# Altium PCB RS-220-973.PcbDoc
Units mil, origin at the board's own origin, x right, y up, seen from the top; angles counter-clockwise.
Board outline 4797 x 2670 mil, 2 copper layers (Top Layer, Bottom Layer); 133 components, 139 nets, 344 pads, 0 vias.
Unrouted connection lines stored in the file: 202.
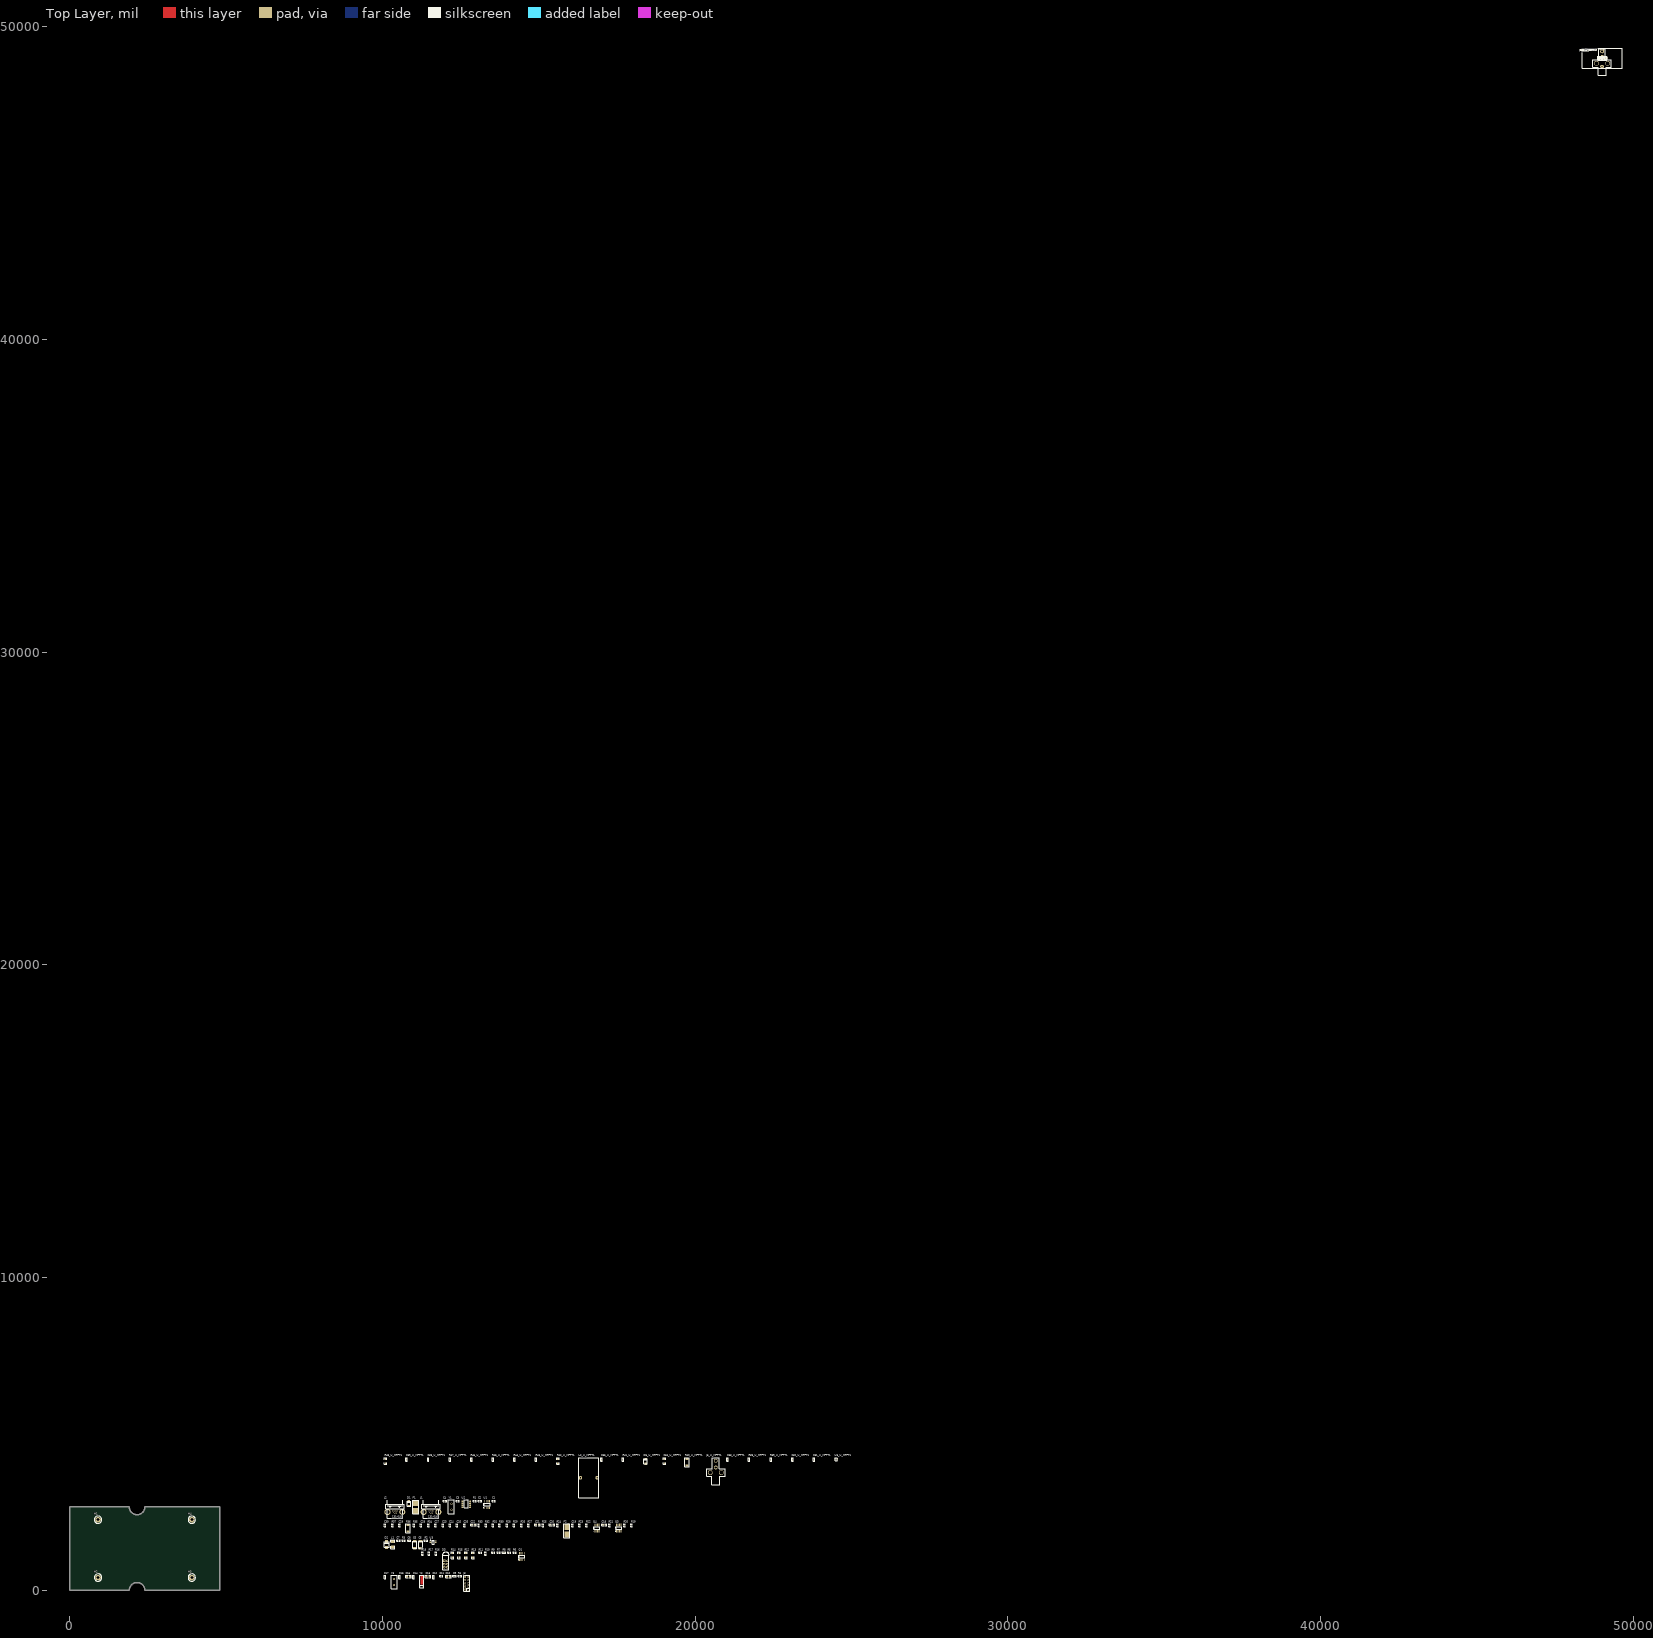
[diagram p0: Top Layer view]
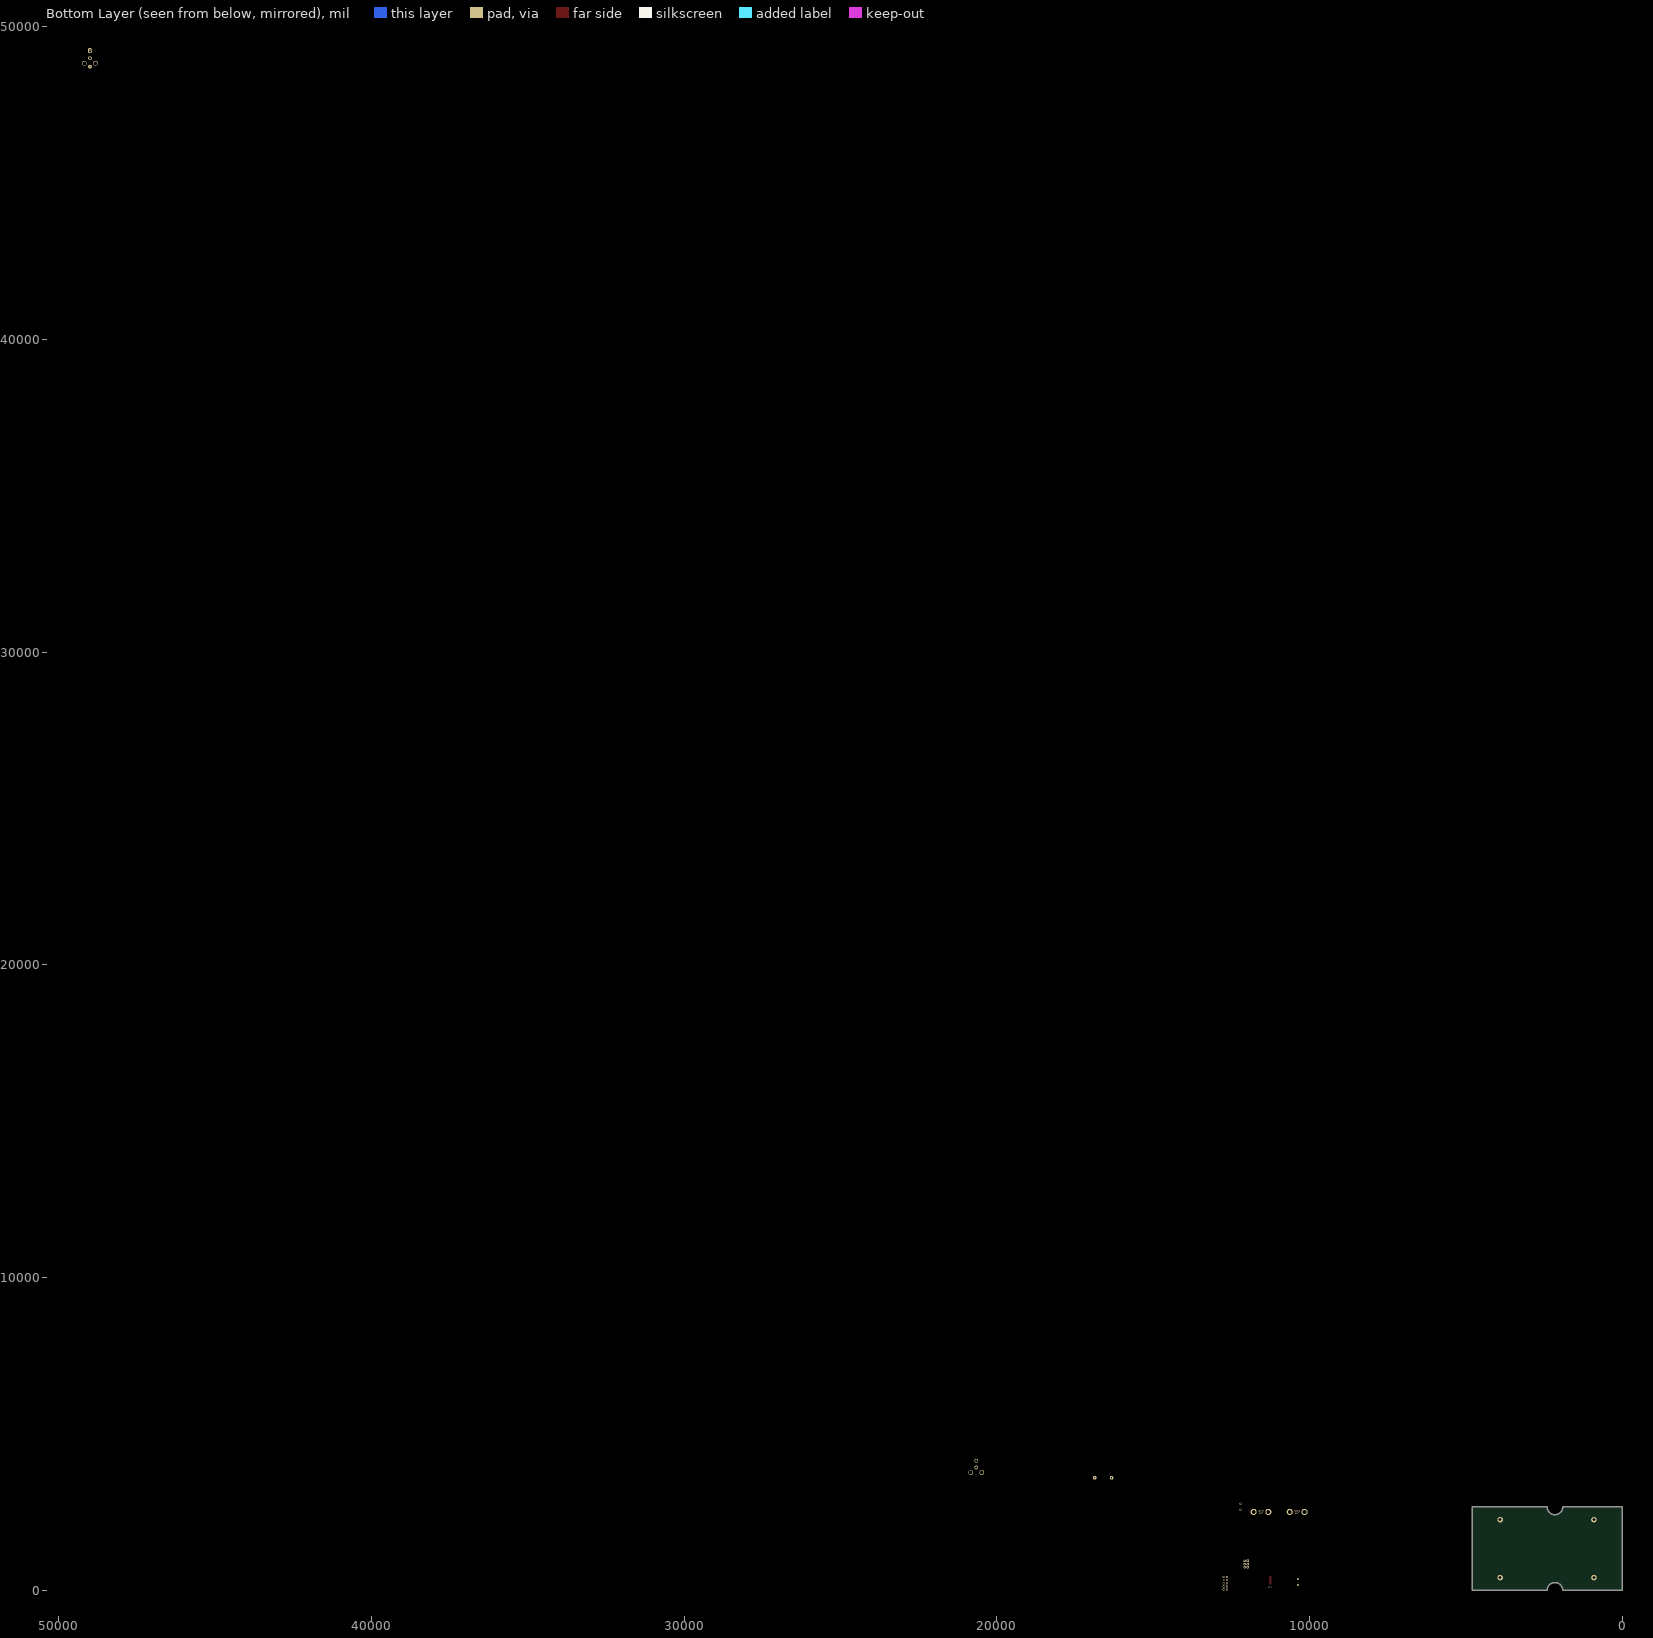
[diagram p1: Bottom Layer view, seen from below]

## Layer stack, top to bottom
Top Layer: signal copper 1.4
Dielectric: dielectric 12.6, FR-4, Dk 4.8
Bottom Layer: signal copper 1.4

## Board outline
0,0 0,2670 1898,2670 ccw(c2148,2670) 2398,2670 4797,2670 4797,0 2398,0 ccw(c2148,0) 1898,0

## Design rules (kind name [scope] priority, off if disabled: settings)
Clearance [All] p1: gap=10
ComponentClearance [All] p1: gap=10 collisioncheckmode=3 verticalgap=10
PolygonConnect [All] p1: connectstyle=Relief reliefconductorwidth=10 reliefentries=4 polygonreliefangle="90 Angle"
RoomDefinition U_3V-Switcher-50mA [InComponentClass('U_3V-Switcher-50mA')] p1: confinementstyle=ConfineIn formatcopy=TRUE lockcomponents=FALSE outline 10045,1290 11740,1290 11740,1725 10045,1725
RoomDefinition "Unisolated CAN" [InComponentClass('Unisolated CAN')] p2: confinementstyle=ConfineIn formatcopy=TRUE lockcomponents=FALSE outline 10045,2295 13615,2295 13615,3000 10045,3000
RoomDefinition U_MPPT2 [InComponentClass('U_MPPT2')] p3: confinementstyle=ConfineIn formatcopy=TRUE lockcomponents=FALSE outline -1000,-1000 1000,-1000 1000,0 -1000,0
RoomDefinition U_MPPT1 [InComponentClass('U_MPPT1')] p4: confinementstyle=ConfineIn formatcopy=TRUE lockcomponents=FALSE outline -1000,-1000 1000,-1000 1000,0 -1000,0
RoomDefinition U_Battery [InComponentClass('U_Battery')] p5: confinementstyle=ConfineIn formatcopy=TRUE lockcomponents=FALSE outline -1000,-1000 1000,-1000 1000,0 -1000,0
RoomDefinition TopLevel [InComponentClass('TopLevel')] p6: confinementstyle=ConfineIn formatcopy=TRUE lockcomponents=FALSE outline -1000,-1000 1000,-1000 1000,0 -1000,0
RoomDefinition MSP430 [InComponentClass('MSP430')] p7: confinementstyle=ConfineIn formatcopy=TRUE lockcomponents=FALSE outline -1000,-1000 1000,-1000 1000,0 -1000,0
RoutingVias [All] p1: holewidth=28 width=50 viastyle="Through Hole" minholewidth=28 minwidth=50 maxholewidth=28 maxwidth=50
SolderMaskExpansion [All] p1: expansion=4
TestPointUsage [All] p1: valid=0 allowmultiple=FALSE
Testpoint [All] p1: side=15 testpointundercomponent=TRUE minsize=40 maxsize=100 preferedsize=60 minholesize=0 maxholesize=40 preferedholesize=32 testpointgrid=1 style=1023 order=0123456789
Width [All] p1: maxlimit=10 minlimit=10 preferedwidth=10
17 further rules are at their usual default settings.

## Classes and differential pairs
channel class MPPT: U_MPPT1 U_MPPT2
component class "Unisolated CAN": C1 C2 C3 C4 D1 F1 J1 J2 R1 U1 U2 Y1
component class U_MPPT2: C31_U_MPPT2 C32_U_MPPT2 C33_U_MPPT2 C34_U_MPPT2 C35_U_MPPT2 C36_U_MPPT2 C37_U_MPPT2 C38_U_MPPT2 C39_U_MPPT2 D4_U_MPPT2 D5_U_MPPT2 J5_U_MPPT2 L2_U_MPPT2 Q5_U_MPPT2 Q6_U_MPPT2 R38_U_MPPT2 R39_U_MPPT2 R40_U_MPPT2 R41_U_MPPT2 R42_U_MPPT2 R43_U_MPPT2 R44_U_MPPT2 R45_U_MPPT2 R46_U_MPPT2 R47_U_MPPT2 R48_U_MPPT2 U6_U_MPPT2 U7_U_MPPT2
component class U_MPPT1: C31_U_MPPT1 C32_U_MPPT1 C33_U_MPPT1 C34_U_MPPT1 C35_U_MPPT1 C36_U_MPPT1 C37_U_MPPT1 C38_U_MPPT1 C39_U_MPPT1 D4_U_MPPT1 D5_U_MPPT1 J5_U_MPPT1 L2_U_MPPT1 Q5_U_MPPT1 Q6_U_MPPT1 R38_U_MPPT1 R39_U_MPPT1 R40_U_MPPT1 R41_U_MPPT1 R42_U_MPPT1 R43_U_MPPT1 R44_U_MPPT1 R45_U_MPPT1 R46_U_MPPT1 R47_U_MPPT1 R48_U_MPPT1 U6_U_MPPT1 U7_U_MPPT1
component class U_Battery: C18 C19 C20 C21 C22 C23 C24 C25 C26 C27 C28 C29 C30 F2 J4 Q3 Q4 R19 R20 R21 R22 R23 R24 R25 R26 R27 R28 R29 R30 R31 R32 R33 R34 R35 R36 R37 U4 U5
component class U_3V-Switcher-50mA: C5 C6 C7 C8 D2 L1 R2 R3 U3
component class TopLevel: D3 H1 H2 H3 H4 Q1 Q2 R5 R6 R7 R8 R9 R10 R11 R12 R13 R14 R15 R16 R17 R18
component class MSP430: C9 C10 C11 C12 C13 C14 C15 C16 C17 IC1 J3 R4 Y2 Y3

## Components (designator, comment, footprint, x,y, rotation, side; value= is the part's Value field where it differs from the comment)
C1 "100nF" 0603 13525,2865 r0 top
C2 "100nF" 0603 13085,2865 r0 top
C3 "30pF" 0603 12375,2865 r0 top
C4 "30pF" 0603 11965,2865 r0 top
C5 "4u7 35V" MCCT-CASEC 11215,1340 r90 top
C6 "4u7 35V" MCCT-CASEC 11030,1340 r90 top
C7 "1n" 0603 10480,1590 r0 top
C8 "100nF" 0603 10820,1590 r0 top
C9 "100nF" 0603 12275,455 r0 top
C10 "10u" 0805 12060,440 r0 top
C11 "10n" 0603 11845,455 r0 top
C12 "100nF" 0603 11625,400 r90 top
C13 "10u" 0805 11410,440 r0 top
C14 "100nF" 0603 10995,400 r90 top
C15 "10u" 0805 10780,440 r0 top
C16 "18pF" 0603 10545,400 r90 top
C17 "18pF" 0603 10080,400 r90 top
C18 "1uF" 0805 17040,2095 r0 top
C19 "100nF" 0603 16075,2055 r90 top
C20 "4.7uF" 0805 15375,2095 r0 top
C21 "1uF" 0805 14910,2095 r0 top
C22 "1uF" 0805 12860,2095 r0 top
C23 "100nF" 0603 11925,2055 r90 top
C24 "100nF" 0603 12155,2055 r90 top
C25 "100nF" 0603 12385,2055 r90 top
C26 "100nF" 0603 12615,2055 r90 top
C27 "100nF" 0603 11695,2055 r90 top
C28 "100nF" 0603 11235,2055 r90 top
C29 "100nF" 0603 10540,2055 r90 top
C30 "100nF" 0603 10080,2055 r90 top
C31_U_MPPT1 "100n" 0603 23795,4160 r90 top (schematic designator C31)
C31_U_MPPT2 "100n" 0603 48999.5,48999.5 r0 top (schematic designator C31)
C32_U_MPPT1 "100n" 0603 23105,4160 r90 top (schematic designator C32)
C32_U_MPPT2 "100n" 0603 48999.5,48999.5 r0 top (schematic designator C32)
C33_U_MPPT1 "100n" 0603 21035,4160 r90 top (schematic designator C33)
C33_U_MPPT2 "100n" 0603 48999.5,48999.5 r0 top (schematic designator C33)
C34_U_MPPT1 "10u" 1206 19020,4065 r90 top (schematic designator C34)
C34_U_MPPT2 "10u" 1206 48999.5,48999.5 r0 top (schematic designator C34)
C36_U_MPPT1 "100n" 0603 17005,4160 r90 top (schematic designator C36)
C36_U_MPPT2 "100n" 0603 48999.5,48999.5 r0 top (schematic designator C36)
C38_U_MPPT1 "100n" 0603 11460,4160 r90 top (schematic designator C38)
C38_U_MPPT2 "100n" 0603 48999.5,48999.5 r0 top (schematic designator C38)
C39_U_MPPT1 "10n" 0603 10770,4160 r90 top (schematic designator C39)
C39_U_MPPT2 "10n" 0603 48999.5,48999.5 r0 top (schematic designator C39)
D1 "12V Transient Suppressor" SMA 10840,2775 r90 top
D2 "MBRS130" SMB 10130,1470 r90 top
D3 "1882-2781" LED_TRILEVEL 11970,940 r0 top
D5_U_MPPT1 "30V Transient Suppressor" SMA 18410,4125 r90 top (schematic designator D5)
D5_U_MPPT2 "30V Transient Suppressor" SMA 48999.5,48999.5 r0 top (schematic designator D5)
F1 "125mA/3A" LITTELFUSE-154 11055,2665 r90 top
F2 "5A" LITTELFUSE-154 15890,1910 r90 top
H1 "HOLE" M2.5 898.5,2260 r0 top
H2 "HOLE" M2.5 898.5,410 r0 top
H3 "HOLE" M2.5 3898.5,410 r0 top
H4 "HOLE" M2.5 3898.5,2260 r0 top
J1 "CON5-S" TRIAD5F 11585,2460 r0 top
J2 "CON5-S" TRIAD5F 10430,2460 r0 top
J3 "Tritium JTAG Connector" IDC10 12740,25 r90 top
J5_U_MPPT1 "MINIFIT JR" MINIFITJR-2 20655,3930 r0 top (schematic designator J5)
J5_U_MPPT2 "MINIFIT JR" MINIFITJR-2 48999.5,48999.5 r0 top (schematic designator J5)
L1 "330uH" 1812 10330,1385 r90 top
L2_U_MPPT1 "680uH" Bourns2321-V-RC 16595,3600 r90 top (schematic designator L2)
L2_U_MPPT2 "680uH" Bourns2321-V-RC 48999.5,48999.5 r0 top (schematic designator L2)
Q1 "SI4425DY" SO8 14455,1085 r0 top
Q3 "FDS6690A" SO8 17555,1990 r0 top
Q4 "FDS6690A" SO8 16845,1990 r0 top
R1 "10k" 0603 12920,2865 r0 top
R2 "100k" 0603 11360,1590 r0 top
R3 "1R2" 0603 10650,1590 r0 top
R4 "10k" 0603 12445,455 r0 top
R5 "10K" 0603 14025,1205 r0 top
R6 "10K" 0603 14195,1205 r0 top
R7 "DNP" 0603 13685,1205 r0 top
R8 "10K" 0603 13855,1205 r0 top
R9 "100R" 0603 13515,1205 r0 top
R10 "10k" 0603 13295,1150 r90 top
R11 "10K" 0603 13095,1205 r0 top
R12 "100k" 1206 12670,1055 r90 top
R13 "100k" 1206 12890,1055 r90 top
R14 "20K" 1206 12230,1055 r90 top
R15 "20K" 1206 12450,1055 r90 top
R16 "1K" 0603 11710,1150 r90 top
R17 "1K" 0603 11490,1150 r90 top
R18 "1K" 0603 11270,1150 r90 top
R19 "10k" 0603 17965,2055 r90 top
R20 "3M" 0603 17735,2055 r90 top
R21 "1K" 0603 17255,2055 r90 top
R22 "1K" 0603 16525,2055 r90 top
R23 "3M" 0603 16295,2055 r90 top
R24 "1K" 0603 15590,2055 r90 top
R25 "100K" 0603 15125,2055 r90 top
R26 "100R" 0603 14435,2055 r90 top
R27 "100R" 0603 14665,2055 r90 top
R28 "100R" 0603 13975,2055 r90 top
R29 "100R" 0603 14205,2055 r90 top
R30 "100R" 0603 13745,2055 r90 top
R31 "100R" 0603 13535,2055 r90 top
R32 "1K" 0603 13305,2055 r90 top
R33 "DNP" 0603 13075,2055 r90 top
R34 "DNP" 0603 11465,2055 r90 top
R35 "1K" 0603 11005,2055 r90 top
R36 "0R01" 2010 10815,1990 r90 top
R37 "1K" 0603 10310,2055 r90 top
R38_U_MPPT1 "1.5K" 0603 21725,4160 r90 top (schematic designator R38)
R38_U_MPPT2 "1.5K" 0603 48999.5,48999.5 r0 top (schematic designator R38)
R39_U_MPPT1 "1.5K" 0603 22415,4160 r90 top (schematic designator R39)
R39_U_MPPT2 "1.5K" 0603 48999.5,48999.5 r0 top (schematic designator R39)
R40_U_MPPT1 "0R01" 2010 19735,4095 r90 top (schematic designator R40)
R40_U_MPPT2 "0R01" 2010 48999.5,48999.5 r0 top (schematic designator R40)
R41_U_MPPT1 "0R" 0603 17695,4160 r90 top (schematic designator R41)
R41_U_MPPT2 "0R" 0603 48999.5,48999.5 r0 top (schematic designator R41)
R42_U_MPPT1 "220k" 1206 15615,4065 r90 top (schematic designator R42)
R42_U_MPPT2 "220k" 1206 48999.5,48999.5 r0 top (schematic designator R42)
R43_U_MPPT1 "0R" 0603 14910,4160 r90 top (schematic designator R43)
R43_U_MPPT2 "0R" 0603 48999.5,48999.5 r0 top (schematic designator R43)
R44_U_MPPT1 "10k" 0603 14220,4160 r90 top (schematic designator R44)
R44_U_MPPT2 "10k" 0603 48999.5,48999.5 r0 top (schematic designator R44)
R45_U_MPPT1 "0R" 0603 12840,4160 r90 top (schematic designator R45)
R45_U_MPPT2 "0R" 0603 48999.5,48999.5 r0 top (schematic designator R45)
R46_U_MPPT1 "20K" 0603 13530,4160 r90 top (schematic designator R46)
R46_U_MPPT2 "20K" 0603 48999.5,48999.5 r0 top (schematic designator R46)
R47_U_MPPT1 "10k" 0603 12150,4160 r90 top (schematic designator R47)
R47_U_MPPT2 "10k" 0603 48999.5,48999.5 r0 top (schematic designator R47)
R48_U_MPPT1 "20K" 1206 10100,4065 r90 top (schematic designator R48)
R48_U_MPPT2 "20K" 1206 48999.5,48999.5 r0 top (schematic designator R48)
U1 "SN65HVD232" SO8 13340,2745 r0 top
U2 "MCP2515X/ST" TSSOP20 12550,2880 r0 top
U3 "LTC1474" TSOP8 11535,1580 r0 top
U6_U_MPPT1 "INA214" SC70-6 24550,4195 r90 top (schematic designator U6)
U6_U_MPPT2 "INA214" SC70-6 48999.5,48999.5 r0 top (schematic designator U6)
Y1 "16MHz" HC49/4H 12200,2455 r90 top
Y2 "32.768 KHz" WATCHA 11215,110 r0 top
Y3 "7.3728 MHz" HC49/4H 10370,45 r90 top

## Footprints (in the part's own frame and the unit in brackets; to place one, negate y for a bottom-side part, rotate by r counter-clockwise, add the part's x,y. Pads: shape width x height; smd on the part's side, far side on the other; paste and mask are expansions set on the pad)
0603 [mil]
  rect 35.43x30 smd: 1(0,0) 2(55,0)
  silkscreen extent -24,-24 79,24
0805 [mm]
  rect 1.7x1.27 smd: 1(0,0) 2(2.286,0)
  silkscreen extent -1,-0.9 3.3,0.9
1206 [mil]
  rect 62.99x60 smd: 1(0,0) 2(135,0)
  silkscreen extent -39,-39 173,39
1812 [mm]
  rect 2.4x3.2 smd: 1(0,0) 2(4.5,0)
  silkscreen extent -1.27,-1.66 5.77,1.7
2010 [mm]
  rect 1.5x2.7 smd: 1(-2.6,0) 2(2.6,0)
  silkscreen extent -3.7,-1.7 3.7,1.7
Bourns2321-V-RC [mm] "Toroidal inductor"
  round 3 hole 1: 1(0,-6.85) 2(0,6.85)
  silkscreen extent -16.26,-8.25 16.26,8.25
HC49/4H [mm]
  round 1.7 hole 0.5: 1(3.085,0) 2(7.965,0)
  silkscreen extent 0,-2.35 11.05,2.35
IDC10 [mm]
  rect 1.6x1.6 hole 0.9: 1(0,0)
  round 1.6 hole 0.9: 2(0,2.54) 3(2.54,0) 4(2.54,2.54) 5(5.08,0) 6(5.08,2.54) 7(7.62,0) 8(7.62,2.54) 9(10.16,0) 10(10.16,2.54)
  silkscreen extent -1.27,-1.27 11.5,3.81
LED_TRILEVEL [mm]
  rect 2x2 hole 1.2: 1(0,0)
  round 2 hole 1.2: 2(0,-2.54) 3(0,-5.08) 4(2.54,-5.08) 5(2.54,-2.54) 6(2.54,0)
  silkscreen extent -1.49,-7.11 4.03,7.21
LITTELFUSE-154 [mm]
  rect 5x3.81 smd: 1(-3.185,0) 2(3.185,0)
  silkscreen extent -5.6,-2.51 5.6,2.5
M2.5 [mm]
  round 4.5 hole 2.5: 1(0,0)
  silkscreen extent -3,-3 3,3
MCCT-CASEC [mm]
  rect 2x3 smd: 1(0,0) 2(6,0)
  silkscreen extent 0,-1.6 6,1.6
MINIFITJR-2 [mm]
  round 4 hole 3.2: 0(-4.5,-4.2) 0(4.5,-4.2)
  round 3 hole 1.8: 1(0,0) 2(0,5.5)
  silkscreen extent -7.5,-13.9 7.5,7.8
SC70-6 [mm]
  rect 0.4x0.9 smd: 1(-0.65,0) 2(0,0) 3(0.65,0) 4(0.65,2.1) 5(0,2.1) 6(-0.65,2.1)
  silkscreen extent -1.1,0.4 1.1,1.7
SMA [mm]
  rect 1.8x2 smd: A(-2,0) K(2,0)
  silkscreen extent -2,-1.48 2,1.48
SMB [mm]
  rect 2.4x2.5 smd: A(-2.385,0) K(2.385,0)
  silkscreen extent -2.28,-1.9 2.3,1.9
SO8 [mm]
  rect 0.6x2.2 smd: 1(-1.905,-2.6)
  oval 0.6x2.2 smd: 2(-0.635,-2.6) 3(0.635,-2.6) 4(1.905,-2.6) 5(1.905,2.6) 6(0.635,2.6) 7(-0.635,2.6) 8(-1.905,2.6)
  silkscreen extent -2.88,-2.72 2.5,1.1
TRIAD5F [mm]
  round 5 hole 3: 0(-6.934,1.219) 0(5.055,1.219)
  round 1.2 hole 0.7: 1(0,0) 2(0.584,2.184) 3(-1.016,2.184) 4(-2.616,2.184) 5(-2.032,0)
  silkscreen extent -8.56,-3.86 6.68,10.87
TSOP8 [mm]
  rect 1.55x0.4 smd: 1(0,0)
  oval 1.55x0.4 smd: 2(0,-0.65) 3(0,-1.3) 4(0,-1.95) 5(4.15,-1.95) 6(4.15,-1.3) 7(4.15,-0.65) 8(4.15,0)
  silkscreen extent -0.12,-2.52 2.98,0.87
TSSOP20 [mm]
  rect 1.6x0.4 smd: 1(0,0)
  oval 1.6x0.4 smd: 2(0,-0.65) 3(0,-1.3) 4(0,-1.95) 5(0,-2.6) 6(0,-3.25) 7(0,-3.9) 8(0,-4.55) 9(0,-5.2) 10(0,-5.85) 11(6.38,-5.85) 12(6.38,-5.2) 13(6.38,-4.55) 14(6.38,-3.9) 15(6.38,-3.25) 16(6.38,-2.6) 17(6.38,-1.95) 18(6.38,-1.3) 19(6.38,-0.65) 20(6.38,0)
  silkscreen extent 1.53,-6.18 4.85,0.33
WATCHA [mm]
  round 1 hole 0.5: 1(0,0) 2(1.7,0)
  Top Layer region: -0.25,1.85 2,1.85 2,8.95 -0.25,8.95
  silkscreen extent -0.7,-0.7 2.4,9.4

## Part data
C1 C2 C3 C4 C7 C8 C9 C11 C12 C14 C16 C17 C18 C19 C20 C21 C22 C23 C24 C25 C26 C27 C28 C29 C30 C31_U_MPPT1 C31_U_MPPT2 C32_U_MPPT1 C32_U_MPPT2 C33_U_MPPT1 C33_U_MPPT2 C34_U_MPPT1 C34_U_MPPT2 C36_U_MPPT1 C36_U_MPPT2 C38_U_MPPT1 C38_U_MPPT2 C39_U_MPPT1 C39_U_MPPT2: library part CAP, "Capacitor"
C5 C6 C10 C13 C15: library part "Cap Pol3", "Polarized Capacitor (Surface Mount)"
D1 D5_U_MPPT1 D5_U_MPPT2: library part DIODE, "Diode"
D2: library part "D SCHOTTKY", "Schottky Diode"
D3: library part LED-TRILEVEL, "Three level LED"
F1 F2: library part FUSE2, "Fuse"
H1 H2 H3 H4: "Hole"
J1 J2: "Connector, 2 pin, with shield @ S"
J3: library part 430F_JTAG_TRITIUM, "Tritium JTAG interface for MSP430"
J5_U_MPPT1 J5_U_MPPT2: library part CON2
L1 L2_U_MPPT1 L2_U_MPPT2: library part Inductor, "Inductor"
Q1: "SI4425DY P Channel Mosfet"
Q3 Q4: "N-type MOSFET"
R1 R9 R12 R13 R14 R15 R42_U_MPPT1 R42_U_MPPT2 R48_U_MPPT1 R48_U_MPPT2: library part RES1
R2 R3 R4 R5 R6 R7 R8 R10 R11 R16 R17 R18 R19 R20 R21 R22 R23 R24 R25 R26 R27 R28 R29 R30 R31 R32 R33 R34 R35 R36 R37 R38_U_MPPT1 R38_U_MPPT2 R39_U_MPPT1 R39_U_MPPT2 R40_U_MPPT1 R40_U_MPPT2 R41_U_MPPT1 R41_U_MPPT2 R43_U_MPPT1 R43_U_MPPT2 R44_U_MPPT1 R44_U_MPPT2 R45_U_MPPT1 R45_U_MPPT2 R46_U_MPPT1 R46_U_MPPT2 R47_U_MPPT1 R47_U_MPPT2: library part RES1, "Resistor"
U1: "3.3V CAN Transciever"
U2: library part MCP2510X/ST, "MCP2510 CAN Controller"
U3: "Step-down converter"
U6_U_MPPT1 U6_U_MPPT2: "High / Low side Current Sensor"
Y1 Y2 Y3: library part CRYSTAL, "Crystal"

## Nets (pads, with @x,y where several pads share a name; then routed paths per layer and width w, separated by ;. In a path a pad name is that pad's centre, name@x,y a point inside that pad or via, vN(x,y) a via of type N, cw(c..) or ccw(c..) an arc to the next point about the centre after c; other vN are vias at no path point)
3V3: C1.2 C2.1 C5.1 C9.1 C10.1 C12.1 C13.1 C32_U_MPPT1.2 C32_U_MPPT2.2 J3.2 L1.2 R1.2 R4.2 R5.2 R6.2 R16.1 R17.1 R18.1 U1.3 U2.20 U3.1 U6_U_MPPT1.3 U6_U_MPPT2.3
"12V MEASURE": R12.2 R14.1
/RESET: C11.1 J3.3 R4.1
ADC0: C39_U_MPPT1.1 R46_U_MPPT1.2
ADC1: U6_U_MPPT1.6
ADC2: C39_U_MPPT2.1 R46_U_MPPT2.2
ADC3: U6_U_MPPT2.6
ADC4: 
ADC5: 
ADC6: R13.2 R15.1
BATT_VCC: C19.1 C22.1 R32.2 R33.2
CAN+12V: C6.1 C7.1 C8.1 D1.K F1.2 Q1.5 Q1.6 Q1.7 Q1.8 R2.2 R3.1 R12.1 U3.7
CAN_5V_RAIL: J1.1 J2.1
CAN_CS: R1.1 U2.18
CAN_H: J1.4 J2.4 U1.7
CAN_INT: U2.13
CAN_L: J1.5 J2.5 U1.6
CAN_SWITCH: R9.1
CANGND: C1.1 C2.2 C3.1 C4.1 C5.2 C6.2 C8.2 C9.2 C10.2 C11.2 C12.2 C13.2 C14.2 C15.2 C16.2 C17.2 C18.2 C19.2 C20.2 C21.2 C22.2 C23.2 C24.2 C25.2 C26.2 C28.2 C30.2 C32_U_MPPT1.1 C32_U_MPPT2.1 C34_U_MPPT1.1 C34_U_MPPT2.1 C36_U_MPPT1.2 C36_U_MPPT2.2 C38_U_MPPT1.2 C38_U_MPPT2.2 C39_U_MPPT1.2 C39_U_MPPT2.2 D1.A D2.A D3.1 D5_U_MPPT1.A D5_U_MPPT2.A J1.3 J2.3 J3.8 J5_U_MPPT1.2 J5_U_MPPT2.2 R10.2 R11.1 R14.2 R15.2 R24.1 R34.1 R36.2 R37.2 R44_U_MPPT1.1 R44_U_MPPT2.1 R47_U_MPPT1.2 R47_U_MPPT2.2 R48_U_MPPT1.2 R48_U_MPPT2.2 U1.2 U2.10 U3.4 U6_U_MPPT1.1 U6_U_MPPT1.2 U6_U_MPPT2.1 U6_U_MPPT2.2
EREF+: 
EREF-: 
LEDRED: D3.3
LEDYLW: D3.2
NetC3_2: C3.2 U2.8 Y1.2
NetC4_2: C4.2 U2.9 Y1.1
NetC7_2: C7.2 R3.2 U3.6
NetC18_1: C18.1 R20.1 R21.1
NetC20_1: C20.1
NetC21_1: C21.1 F2.2 Q4.1 Q4.2 Q4.3 R23.2
NetC23_1: C23.1 R26.1
NetC24_1: C24.1 R28.1
NetC25_1: C25.1 R30.1
NetC26_1: C26.1 R31.1
NetC27_1: C27.1
NetC27_2: C27.2
NetC28_1: C28.1 C29.1 R35.1
NetC29_2: C29.2 C30.1 R37.1
NetC31_U_MPPT1_1: C31_U_MPPT1.1 R38_U_MPPT1.2 U6_U_MPPT1.5
NetC31_U_MPPT1_2: C31_U_MPPT1.2 R39_U_MPPT1.2 U6_U_MPPT1.4
NetC31_U_MPPT2_1: C31_U_MPPT2.1 R38_U_MPPT2.2 U6_U_MPPT2.5
NetC31_U_MPPT2_2: C31_U_MPPT2.2 R39_U_MPPT2.2 U6_U_MPPT2.4
NetC33_U_MPPT1_1: C33_U_MPPT1.1
NetC33_U_MPPT1_2: C33_U_MPPT1.2 L2_U_MPPT1.1
NetC33_U_MPPT2_1: C33_U_MPPT2.1
NetC33_U_MPPT2_2: C33_U_MPPT2.2 L2_U_MPPT2.1
NetC38_U_MPPT1_1: C38_U_MPPT1.1
NetC38_U_MPPT2_1: C38_U_MPPT2.1
NetD2_K: D2.K L1.1 U3.5
NetD3_4: D3.4 R16.2
NetD3_5: D3.5 R17.2
NetD3_6: D3.6 R18.2
NetD4_U_MPPT1_A: 
NetD4_U_MPPT2_A: 
NetD5_U_MPPT1_K: D5_U_MPPT1.K J5_U_MPPT1.1 R39_U_MPPT1.1 R40_U_MPPT1.1 R42_U_MPPT1.1
NetD5_U_MPPT2_K: D5_U_MPPT2.K J5_U_MPPT2.1 R39_U_MPPT2.1 R40_U_MPPT2.1 R42_U_MPPT2.1
NetF1_1: F1.1 J1.2 J2.2
NetF2_1: F2.1 R26.2
NetJ4_2: R28.2
NetJ4_3: R30.2
NetJ4_4: R31.2 R35.2 R36.1
NetQ1_4: Q1.4 R8.1
NetQ2_1: R7.1 R9.2 R11.2
NetQ3_4: Q3.4 R21.2
NetQ3_5: Q3.5 Q3.6 Q3.7 Q3.8 Q4.5 Q4.6 Q4.7 Q4.8
NetQ4_4: Q4.4 R22.2
NetQ5_U_MPPT1_1: R41_U_MPPT1.2
NetQ5_U_MPPT2_1: R41_U_MPPT2.2
NetQ6_U_MPPT1_1: R45_U_MPPT1.2
NetQ6_U_MPPT2_1: R45_U_MPPT2.2
NetR2_1: R2.1 U3.8
NetR19_1: R19.1 R25.1
NetR22_1: R22.1 R23.1
NetR24_2: R24.2
NetR25_2: R25.2
NetR27_1: R27.1
NetR29_1: R29.1
NetR32_1: R32.1
NetR41_U_MPPT1_1: R41_U_MPPT1.1
NetR41_U_MPPT2_1: R41_U_MPPT2.1
NetR42_U_MPPT1_2: R42_U_MPPT1.2 R46_U_MPPT1.1 R48_U_MPPT1.1
NetR42_U_MPPT2_2: R42_U_MPPT2.2 R46_U_MPPT2.1 R48_U_MPPT2.1
NetR43_U_MPPT1_2: R43_U_MPPT1.2
NetR43_U_MPPT2_2: R43_U_MPPT2.2
NetR45_U_MPPT1_1: R45_U_MPPT1.1
NetR45_U_MPPT2_1: R45_U_MPPT2.1
NetU1_1: U1.1 U2.1
NetU1_4: U1.4 U2.2
NetU2_3: U2.3
NetU4_5: 
NetU4_26: 
NetU4_28: 
NetU4_29: 
NetU4_30: 
P1.1: 
P1.2: 
P1.3: 
P1.4: 
P1.5: 
P1.6: 
P1.7: 
P2.0: R43_U_MPPT1.1 R44_U_MPPT1.2
P2.1: R43_U_MPPT2.1 R44_U_MPPT2.2
P2.2: 
P2.3: R47_U_MPPT2.1
P2.4: R47_U_MPPT1.1
P2.5: 
P2.6: R10.1 U2.19
P3.0: R33.1 R34.2
P3.1: R6.1 R27.2
P3.2: R5.1 R29.2
P3.3: 
P3.4: 
P3.5: 
P3.6: 
P3.7: 
P4.0: 
P4.1: 
P4.2: 
P4.3: 
P4.4: 
P4.5: 
P4.6: 
P4.7: 
P5.1: U2.16
P5.2: U2.17
P5.3: U2.14
P5.4: 
P5.5: 
PACK+: C34_U_MPPT1.2 C34_U_MPPT2.2 C36_U_MPPT1.1 C36_U_MPPT2.1 L2_U_MPPT1.2 L2_U_MPPT2.2 Q1.1 Q1.2 Q1.3 Q3.1 Q3.2 Q3.3 R7.2 R8.2 R13.1 R19.2 R20.2
PV: R38_U_MPPT1.1 R38_U_MPPT2.1 R40_U_MPPT1.2 R40_U_MPPT2.2
TCK: J3.7
TDI: J3.5
TDO: J3.4
TMS: J3.6
VREF: C14.1 C15.1
XT1IN: Y2.2
XT1OUT: Y2.1
XT2IN: C17.1 Y3.1
XT2OUT: C16.1 Y3.2
pads on no net: H1.1 H2.1 H3.1 H4.1 J1.0 J2.0 J3.1 J3.9 J3.10 J5_U_MPPT1.0 J5_U_MPPT2.0 U1.5 U1.8 U2.4 U2.5 U2.6 U2.7 U2.11 U2.12 U2.15 U3.2 U3.3

## Silkscreen, mask and mechanical layers (free items; w line width, h text height)
Mechanical 1:
  the board outline again, w1

## Text inside footprints (layer, text, board x,y; h text height)
J1: Top Overlay "131-040" at 11458,2328 h30
J2: Top Overlay "131-040" at 10303,2328 h30